# Altium PCB SixAxIMU_VN.PcbDoc
Units mm, origin at the board's own origin, x right, y up, seen from the top; angles counter-clockwise.
Board outline 30 x 35 mm, 2 copper layers (Top Layer, Bottom Layer); 23 components, 18 nets, 93 pads, 184 vias.
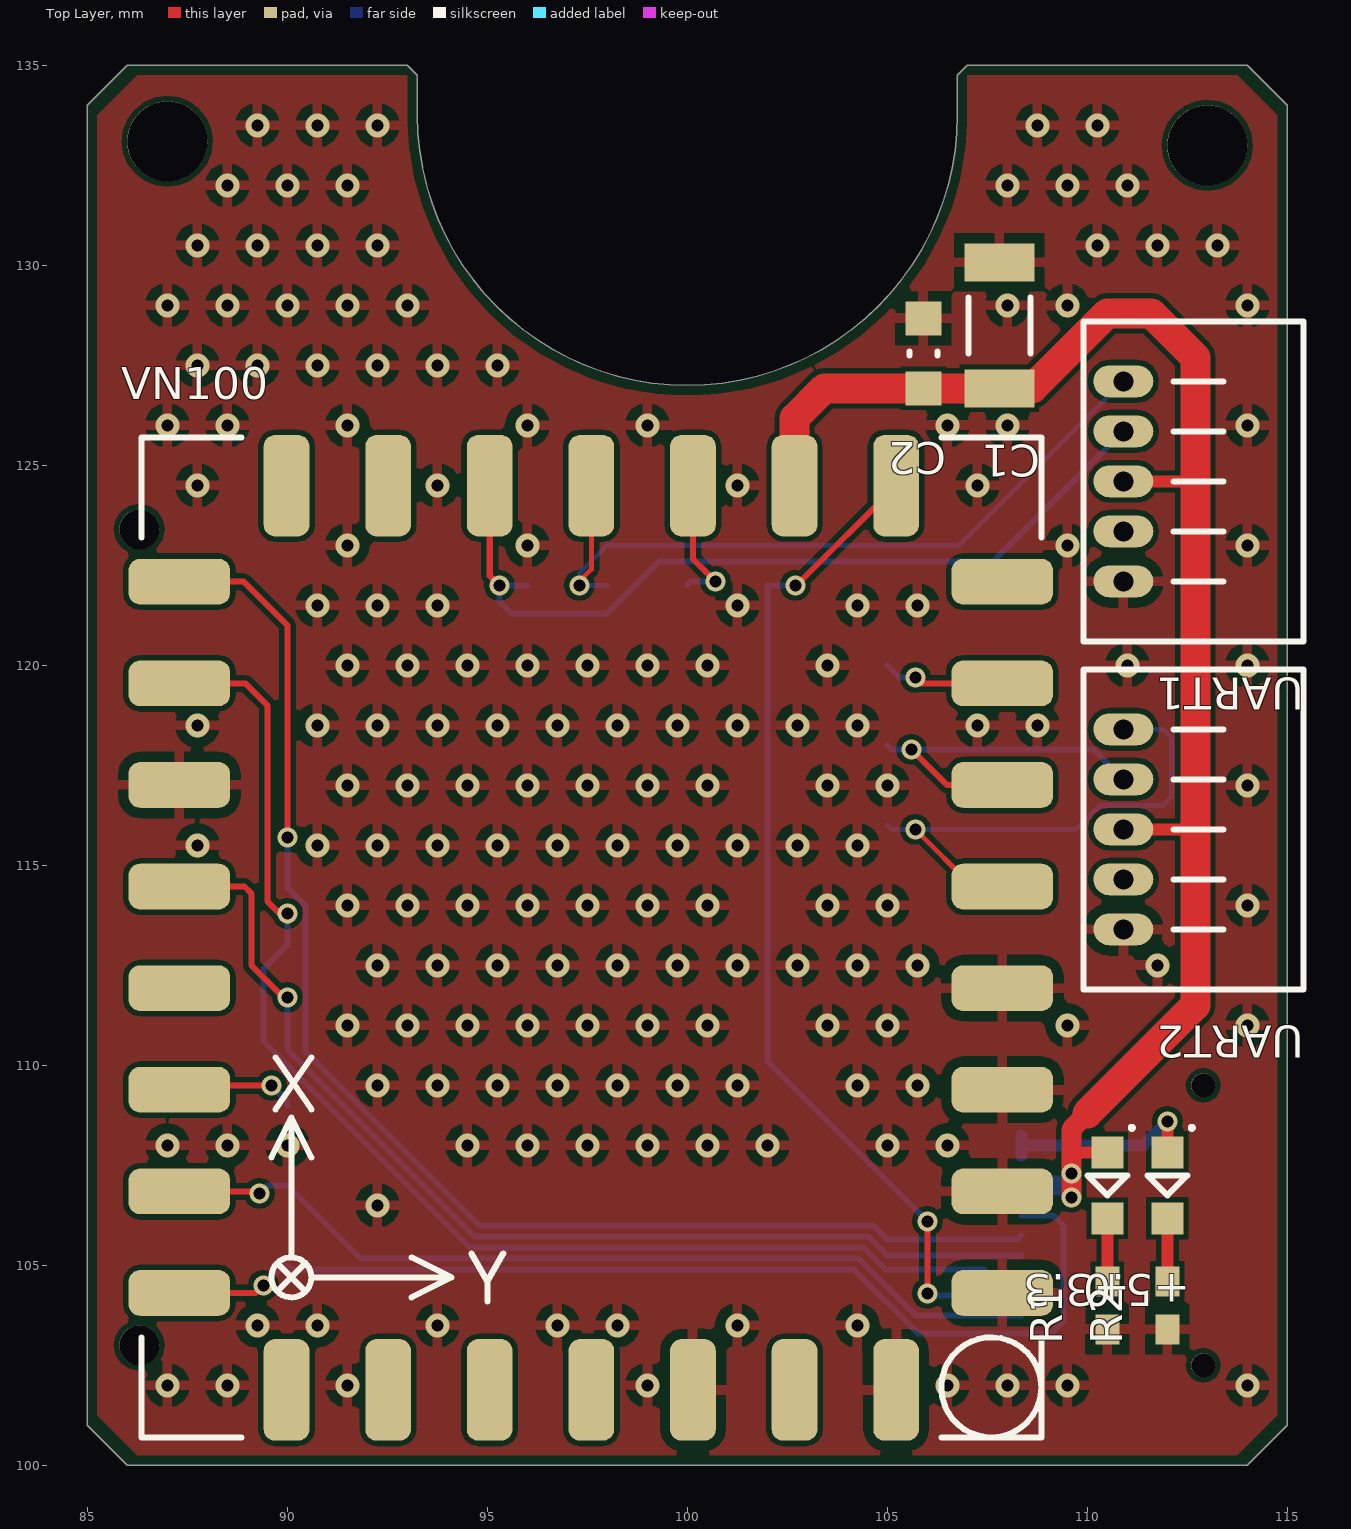
[diagram p0: Top Layer view]
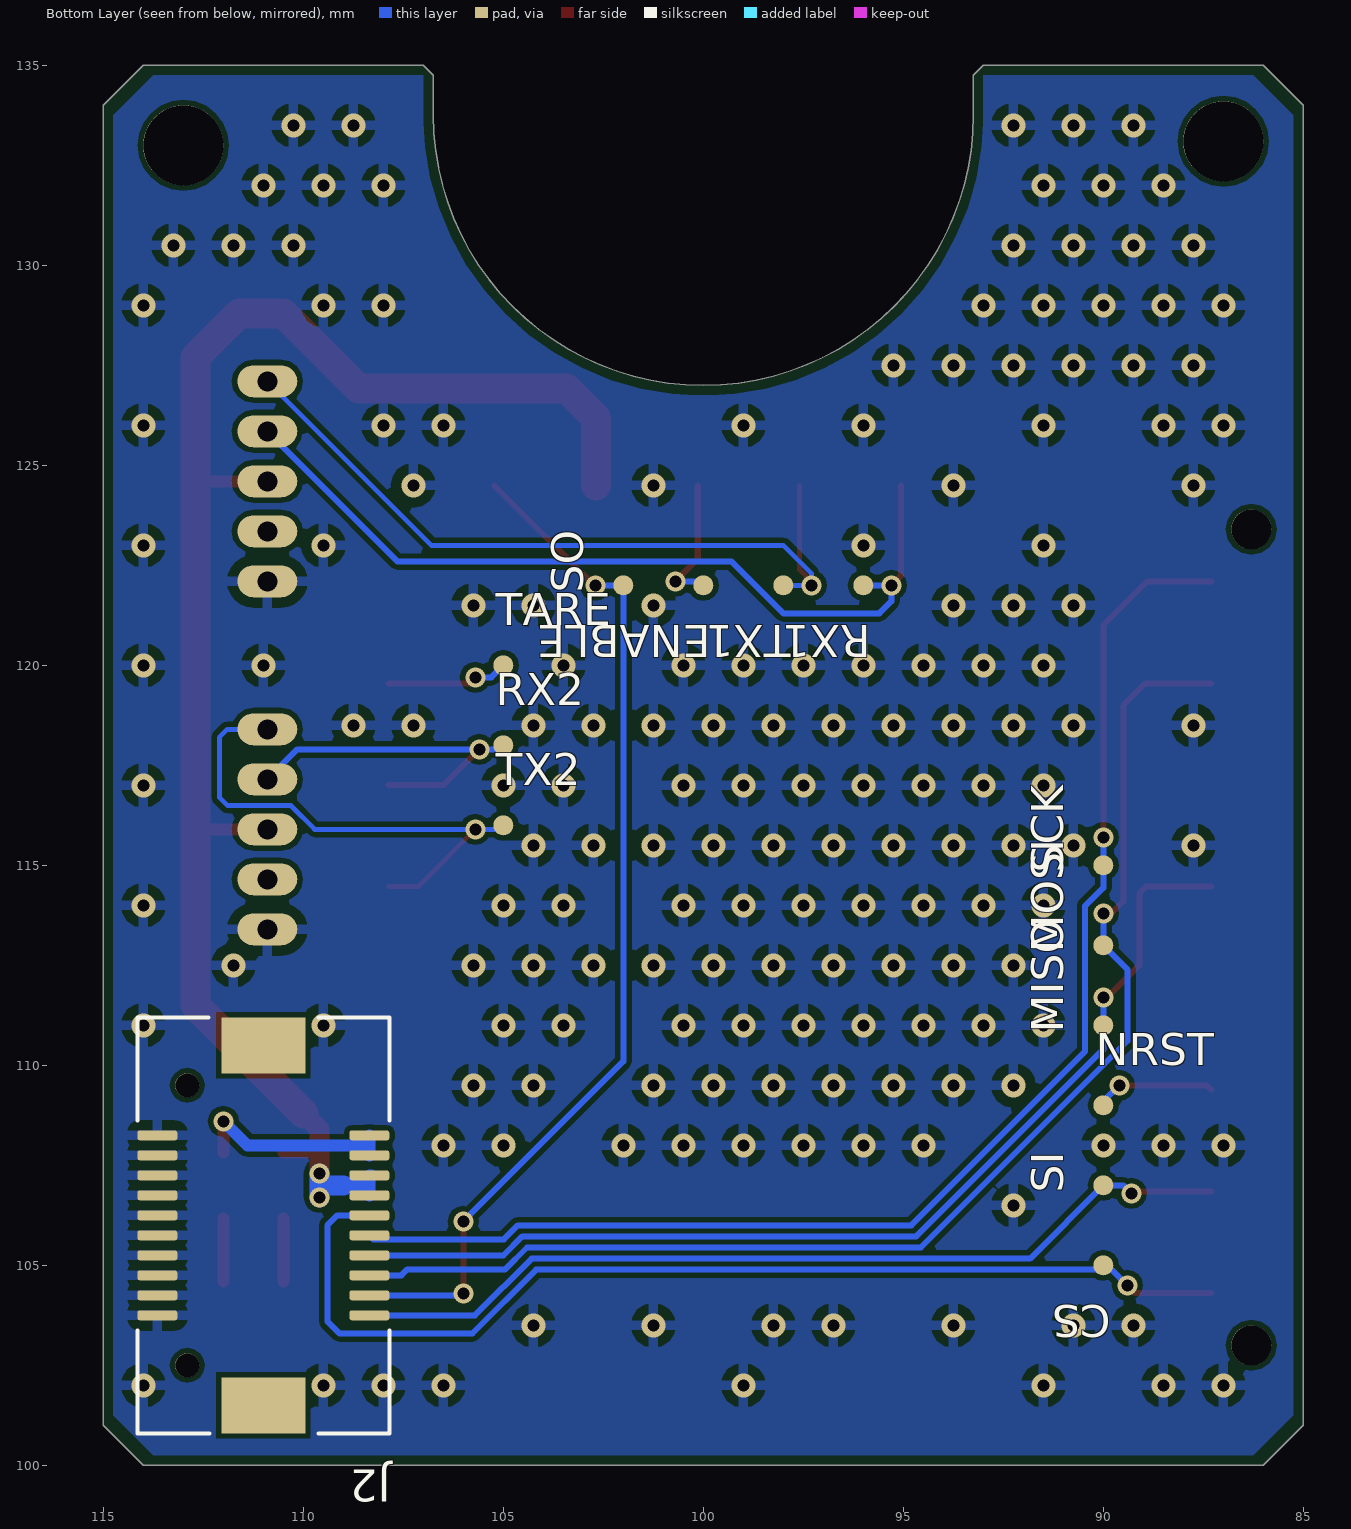
[diagram p1: Bottom Layer view, seen from below]

## Layer stack, top to bottom
Top Solder: solder mask 0.0102, Solder Resist, Dk 3.5
Top Layer: signal copper 0.0356
Dielectric 1: dielectric 0.32, FR-4, Dk 4.8
Bottom Layer: signal copper 0.0356
Bottom Solder: solder mask 0.0102, Solder Resist, Dk 3.5

## Board outline
86,100 85,101 85,134 86,135 93,135 93.25,134.75 93.25,133.75 ccw(c100,133.75) 100,127 ccw(c100,133.75) 106.75,133.75 106.75,134.75 107,135 114,135 115,134 115,101 114,100

## Design rules (kind name [scope] priority, off if disabled: settings)
Clearance Clearance_2 [InNamedPolygon('GND_L02_P006')] p1: gap=0.35
Clearance Clearance_1 [InNamedPolygon('+3.3_L03_P010')] p2: gap=0.35
Clearance [All] p3: gap=0.127
HoleSize [All] p1: absolutevalues=TRUE maxlimit=3 minlimit=0.2 maxpercent=80.000 minpercent=20.000
MinimumSolderMaskSliver [All] p1: minsoldermaskwidth=0.127
PlaneClearance [All] p1: clearance=0.5
PlaneConnect [All] p1: planeconnectstyle=Relief reliefexpansion=0.5 reliefentries=4 reliefconductorwidth=0.25 reliefairgap=0.25
PolygonConnect PolygonConnect_2 [All vs IsNamedPolygon('GND_RF_L01_P004')] p1: connectstyle=Direct reliefconductorwidth=0.254 reliefentries=4 polygonreliefangle="90 Angle" airgapwidth=0.254
PolygonConnect PolygonConnect_1 [All vs IsNamedPolygon('GND_RF_L04_P002')] p2: connectstyle=Direct reliefconductorwidth=0.254 reliefentries=4 polygonreliefangle="90 Angle" airgapwidth=0.254
PolygonConnect [All] p3: connectstyle=Relief reliefconductorwidth=0.25 reliefentries=4 polygonreliefangle="90 Angle" airgapwidth=0.25
RoutingCorners [All] p1: cornerstyle=45-Degree minsetback=2 maxsetback=2
RoutingVias [All] p1: holewidth=0.3 width=0.5 viastyle="Through Hole" minholewidth=0.2 minwidth=0.5 maxholewidth=0.5 maxwidth=0.7
SilkToSilkClearance [All] p1: silktosilkclearance=0.127
SilkToSolderMaskClearance [IsPad] p1: minsilkscreentomaskgap=0.127 clearancetoexposedcopper=TRUE
SolderMaskExpansion [All] p1: expansion=0.1
Width Width_POWERS [InNetClass('POWERS')] p1: maxlimit=1 minlimit=0.15 preferedwidth=0.5
Width [All] p2: maxlimit=0.3 minlimit=0.127 preferedwidth=0.15
23 further rules are at their usual default settings.

## Classes and differential pairs
net class POWERS: +3.3 +5.0 GND

## Components (designator, comment, footprint, x,y, rotation, side; value= is the part's Value field where it differs from the comment)
+3.3 "Red" "LED 0603" 110.5,107 r270 top
+5.0 "Red" "LED 0603" 112,107 r270 top
C1 "CL31A107MQHNNNE" "CAP 1206" 107.8,128.5 r270 top
C2 "CL10A105KA8NNNC" "CAP 0603" 105.9,127.8 r270 top
CS "TEST" "TEST_0.5mm, SMD" 90,105 r0 bottom
ENABLE "TEST" "TEST_0.5mm, SMD" 100,122 r0 bottom
J2 "DF17(2.0)-20DP-0.5V(57)" DF17(2.0)-20DP-0.5V(57) 111,106 r270 bottom
MISO "TEST" "TEST_0.5mm, SMD" 90,111 r0 bottom
MOSI "TEST" "TEST_0.5mm, SMD" 90,113 r0 bottom
NRST "TEST" "TEST_0.5mm, SMD" 90,109 r90 bottom
R1 "P311-1.00KLRTR-ND" "RES 0402" 110.5,104 r90 top
R2 "P311-1.00KLRTR-ND" "RES 0402" 112,104 r90 top
RX1 "TEST" "TEST_0.5mm, SMD" 96,122 r0 bottom
RX2 "TEST" "TEST_0.5mm, SMD" 105,118 r90 bottom
SCK "TEST" "TEST_0.5mm, SMD" 90,115 r0 bottom
SI "TEST" "TEST_0.5mm, SMD" 90,107 r90 bottom
SO "TEST" "TEST_0.5mm, SMD" 102,122 r90 bottom
TARE "TEST" "TEST_0.5mm, SMD" 105,120 r90 bottom
TX1 "TEST" "TEST_0.5mm, SMD" 98,122 r0 bottom
TX2 "TEST" "TEST_0.5mm, SMD" 105,116 r90 bottom
UART1 "53048-0510" "PicoBlade, 53048-0510" 110.9,124.6 r270 top
UART2 "53048-0510" "PicoBlade, 53048-0510" 110.9,115.9 r270 top
VN100 "VN-100" VN-100 97.6,113.2 r0 top

## Footprints (in the part's own frame and the unit in brackets; to place one, negate y for a bottom-side part, rotate by r counter-clockwise, add the part's x,y. Pads: shape width x height; smd on the part's side, far side on the other; paste and mask are expansions set on the pad)
"CAP 0603" [mm] "Chip Capacitor, 2-Leads, Body 1.60x0.80mm, IPC Medium Density"
  rect 0.85x0.9 smd: 1(-0.875,0) 2(0.875,0)
  silkscreen extent -0.05,-0.35 0.05,0.35, body extent -0.8,-0.4 0.8,0.4, height 0.8
"CAP 1206" [mm] "Chip Capacitor, 2-Leads, Body 3.20x1.60mm, IPC Medium Density"
  rect 0.95x1.75 smd: 1(-1.575,0) 2(1.575,0)
  silkscreen extent -0.7,-0.77 0.7,0.78, body extent -1.6,-0.8 1.6,0.8, height 1.6
DF17(2.0)-20DP-0.5V(57) [mm] "B2B, 20 POS HDR"
  rrect50% 0.25x1 smd: 1(-2.25,-2.65) 2(-1.75,-2.65) 3(-1.25,-2.65) 4(-0.75,-2.65) 5(-0.25,-2.65) 6(0.25,-2.65) 7(0.75,-2.65) 8(1.25,-2.65) 9(1.75,-2.65) 10(2.25,-2.65) 11(2.25,2.65) 12(1.75,2.65) 13(1.25,2.65) 14(0.75,2.65) 15(0.25,2.65) 16(-0.25,2.65) 17(-0.75,2.65) 18(-1.25,2.65) 19(-1.75,2.65) 20(-2.25,2.65)
  round 0.6 hole 0.6 unplated: 25(-3.5,-1.9) 26(3.5,-1.9)
  rect 1.4x2.1 smd: S0(-4.5,0) S1(4.5,0)
  silkscreen extent -5.2,-3.15 5.2,3.15, body extent -5,-2.85 5,2.85, height 4.26
"LED 0603" [mm] "Chip LED, 2-Leads, Body 1.60x0.80mm, IPC Medium Density"
  rect 0.8x0.8 smd: A(-0.825,0) K(0.825,0)
  silkscreen extent -1.49,-0.5 0.25,0.66, body extent -0.8,-0.4 0.8,0.4, height 0.75
"PicoBlade, 53048-0510" [mm] "PicoBlade, Header, R/A, PTH, 5 Pos, 1.25mm Pitch"
  oval 0.8x1.5 hole 0.5: 1(2.5,0) 2(1.25,0) 3(0,0) 4(-1.25,0) 5(-2.5,0)
  silkscreen extent -4,-1 4,4.5, body extent -4,-1.05 4,4.45, height 3.51
"RES 0402" [mm] "Chip Resistor, 2-Leads, Body 1.00x0.50mm, IPC Medium Density"
  rect 0.75x0.6 smd: 1(-0.6,0) 2(0.6,0)
  body extent -0.5,-0.25 0.5,0.25, height 0.35
"TEST_0.5mm, SMD" [mm]
  round 0.5 smd: 0(0,0)
VN-100 [mil] "VectorNav VN-100 SMD"
  rrect50% 100x45 smd: 1(404.5,-350) 2(404.5,-250) 3(404.5,-150) 4(404.5,-50) 5(404.5,50) 6(404.5,150) 7(404.5,250) 8(404.5,350) 16(-405.5,350) 17(-405.5,250) 18(-405.5,150) 19(-405.5,50) 20(-405.5,-50) 21(-405.5,-150) 22(-405.5,-250) 23(-405.5,-350)
  rrect50% 45x100 smd: 9(300,444.5) 10(200,444.5) 11(100,444.5) 12(0,444.5) 13(-100,444.5) 14(-200,444.5) 15(-300,444.5) 24(-300,-445.5) 25(-200,-445.5) 26(-100,-445.5) 27(0,-445.5) 28(100,-445.5) 29(200,-445.5) 30(300,-445.5)
  round 39.37 hole 39.37 unplated: 31(-444.88,-401.57) 32(-444.88,401.58)
  silkscreen extent -443,-492 443,492, body extent -425,-473 425,472, height 138

## Part data
+3.3 +5.0: library part 1608SURC-06, "LED, Red, 0603"
C1: "MLCC, 100uF, 1206, 20%, 6.3V, X5R"
C2: "MLCC, 1uF, 0603, 10%, 25V, X5R"
J2: "Conn, B2B, 20 Pos, HEADER"
R1 R2: "RES, 0402, 1k, 1%"
UART1 UART2: "PicoBlade, Header, R/A, PTH, 5 Pos, 1.25mm Pitch"
VN100: "Vector Nav SMD IMU/AHRS"

## Free pads (board coordinates)
  round 2 hole 2 unplated: HOLE(87,133.1) HOLE(113,133)

## Via types
v1: diameter 0.6, hole 0.3, Top Layer to Bottom Layer, tented both sides, 166 vias
v2: diameter 0.5, hole 0.3, Top Layer to Bottom Layer, tented both sides, 18 vias

## Nets (pads, with @x,y where several pads share a name; then routed paths per layer and width w, separated by ;. In a path a pad name is that pad's centre, name@x,y a point inside that pad or via, vN(x,y) a via of type N, cw(c..) or ccw(c..) an arc to the next point about the centre after c; other vN are vias at no path point)
+3.3: +3.3.A C1.2 C2.2 J2.17 J2.18 UART1.3 UART2.3 VN100.10 | length 42.5
  Top Layer w0.3: 109.6,107.85 109.625,107.825 +3.3.A ; UART2.3 112.7,115.9 ; UART1.3 112.7,124.6
  Top Layer w0.5: v2(109.6,106.7) v2(109.6,107.3) 109.6,107.85 109.6,108.4 110,108.8
  Top Layer w0.75: VN100.10 102.68,126.18 103.425,126.925 C2.2 C1.2 108.625,126.925 110.5,128.8 111.6,128.8 112.7,127.7 112.7,124.6 112.7,115.9 112.7,111.5 110,108.8
  Bottom Layer w0.3: J2.17 108.35,107 ; J2.18 108.298,107.25 108.35,107.198 108.35,107 ; 109,107 108.35,107
  Bottom Layer w0.5: 109,107 109.5,107 v2@109.6,106.9 ; v2(109.6,106.7) v2@109.6,106.9 ; v2(109.6,107.3) v2@109.6,106.9
+5.0: +5.0.A J2.19 J2.20 | length 5.2
  Top Layer w0.3: +5.0.A v2(112,108.6)
  Bottom Layer w0.3: J2.19 108.35,108 ; J2.20 108.35,108 ; v2(112,108.6) 111.4,108 108.35,108
GND: C1.1 C2.1 J2.1 J2.2 J2.3 J2.4 J2.5 J2.6 J2.7 J2.8 J2.9 J2.10 R1.1 R2.1 UART1.1 UART2.1 VN100.1 VN100.2 VN100.3 VN100.4 VN100.18 VN100.28 VN100.30
  other v1: 87,102 88.5,102 91.5,102 99,102 106.5,102 108,102 109.5,102 114,102 89.25,103.5 90.75,103.5 93.75,103.5 96.75,103.5 98.25,103.5 101.25,103.5 104.25,103.5 92.25,106.5 87,108 88.5,108 90,108 94.5,108 96,108 97.5,108 99,108 100.5,108 102,108 105,108 106.5,108 92.25,109.5 93.75,109.5 95.25,109.5 96.75,109.5 98.25,109.5 99.75,109.5 101.25,109.5 104.25,109.5 105.75,109.5 91.5,111 93,111 94.5,111 96,111 97.5,111 99,111 100.5,111 103.5,111 105,111 109.5,111 114,111 92.25,112.5 93.75,112.5 95.25,112.5 96.75,112.5 98.25,112.5 99.75,112.5 101.25,112.5 102.75,112.5 104.25,112.5 105.75,112.5 111.75,112.5 91.5,114 93,114 94.5,114 96,114 97.5,114 99,114 100.5,114 103.5,114 105,114 114,114 87.75,115.5 90.75,115.5 92.25,115.5 93.75,115.5 95.25,115.5 96.75,115.5 98.25,115.5 99.75,115.5 101.25,115.5 102.75,115.5 104.25,115.5 91.5,117 93,117 94.5,117 96,117 97.5,117 99,117 100.5,117 103.5,117 105,117 114,117 87.75,118.5 90.75,118.5 92.25,118.5 93.75,118.5 95.25,118.5 96.75,118.5 98.25,118.5 99.75,118.5 101.25,118.5 102.75,118.5 104.25,118.5 107.25,118.5 108.75,118.5 91.5,120 93,120 94.5,120 96,120 97.5,120 99,120 100.5,120 103.5,120 111,120 114,120 90.75,121.5 92.25,121.5 93.75,121.5 101.25,121.5 104.25,121.5 105.75,121.5 91.5,123 96,123 109.5,123 114,123 87.75,124.5 93.75,124.5 101.25,124.5 107.25,124.5 87,126 88.5,126 91.5,126 96,126 99,126 106.5,126 108,126 114,126 87.75,127.5 89.25,127.5 90.75,127.5 92.25,127.5 93.75,127.5 95.25,127.5 87,129 88.5,129 90,129 91.5,129 93,129 108,129 109.5,129 114,129 87.75,130.5 89.25,130.5 90.75,130.5 92.25,130.5 110.25,130.5 111.75,130.5 113.25,130.5 88.5,132 90,132 91.5,132 108,132 109.5,132 111,132 89.25,133.5 90.75,133.5 92.25,133.5 108.75,133.5 110.25,133.5
Net+3.3_K: +3.3.K R1.2 | length 1.6
  Top Layer w0.3: R1.2 +3.3.K
Net+5.0_K: +5.0.K R2.2 | length 1.6
  Top Layer w0.3: R2.2 +5.0.K
NetENABLE_0: ENABLE.0 VN100.11 | length 3.4
  Top Layer w0.152: VN100.11 100.14,122.66 v2(100.7,122.1)
  Bottom Layer w0.152: ENABLE.0 100.1,122.1 v2(100.7,122.1)
NetNRST_0: NRST.0 VN100.21 | length 3
  Top Layer w0.15: VN100.21 87.41,109.5 v2(89.6,109.5)
  Bottom Layer w0.15: v2(89.6,109.5) 90,109.1 NRST.0
NetTARE_0: TARE.0 VN100.7 | length 3.1
  Top Layer w0.152: v2(105.7,119.7) 105.85,119.55 VN100.7
  Bottom Layer w0.152: TARE.0 105.3,119.7 v2(105.7,119.7)
SPI1_MISO: J2.14 MISO.0 VN100.19 | length 26.8
  Top Layer w0.15: VN100.19 88.93,114.47 89.1,114.3 89.1,112.5 90,111.6 v2(90,111.7)
  Bottom Layer w0.15: v2(90,111.7) MISO.0 90,110.4 94.677,105.723 104.522,105.723 104.995,105.25 J2.14
SPI1_MOSI: J2.13 MOSI.0 VN100.17 | length 33.1
  Top Layer w0.15: VN100.17 88.95,119.55 89.5,119 89.5,114.1 90,113.6 v2(90,113.8)
  Bottom Layer w0.15: v2(90,113.8) MOSI.0 89.4,112.4 89.4,110.608 94.562,105.446 104.407,105.446 104.953,104.9 107.4,104.9 107.55,104.75 J2.13
SPI1_NSS: CS.0 J2.16 VN100.23 | length 26.8
  Top Layer w0.15: VN100.23 89.21,104.31 v2(89.4,104.5)
  Bottom Layer w0.15: v2(89.4,104.5) 89.9,105 CS.0 90.108,104.892 104.178,104.892 105.77,103.3 109.1,103.3 109.4,103.6 109.4,106 109.15,106.25 J2.16
SPI1_SCK: J2.15 SCK.0 VN100.16 | length 33.9
  Top Layer w0.15: VN100.16 88.91,122.09 90,121 v2(90,115.7)
  Bottom Layer w0.15: v2(90,115.7) SCK.0 90,114.439 90.452,113.987 90.452,110.348 94.8,106 104.637,106 104.989,105.648 108.248,105.648 J2.15
SYNC_IN: J2.11 SI.0 VN100.22 | length 22.5
  Top Layer w0.15: VN100.22 89.25,106.85 v2(89.3,106.8)
  Bottom Layer w0.15: v2(89.3,106.8) 89.5,107 SI.0 91.831,105.169 104.293,105.169 105.712,103.75 J2.11
SYNC_OUT: J2.12 SO.0 VN100.9 | length 26
  Top Layer w0.15: v2(106,104.3) v2(106,106.1)
  Top Layer w0.152: v2(102.7,122) 102.73,122 VN100.9
  Bottom Layer w0.15: SO.0 102,110.1 v2(106,106.1) ; v2(106,104.3) 106.05,104.25 J2.12
  Bottom Layer w0.152: SO.0@102,122 v2(102.7,122)
UART1_RX: RX1.0 UART1.4 VN100.13 | length 21.3
  Top Layer w0.152: VN100.13 95.06,122.24 v2(95.3,122)
  Bottom Layer w0.152: RX1.0 v2(95.3,122) 95.3,121.6 95.6,121.3 98,121.3 99.3,122.6 107.65,122.6 UART1.4
UART1_TX: TX1.0 UART1.5 VN100.12 | length 19.2
  Top Layer w0.127: v2(97.3,122) 97.3,122.1 97.6,122.4 VN100.12
  Bottom Layer w0.127: TX1.0 v2(97.3,122) 97.3,122.3 98,123 106.8,123 UART1.5
UART2_RX: RX2.0 UART2.4 VN100.6 | length 8.9
  Top Layer w0.152: v2(105.6,117.9) 106.49,117.01 VN100.6
  Bottom Layer w0.152: RX2.0 105.1,117.9 v2(105.6,117.9) 110.15,117.9 UART2.4
UART2_TX: TX2.0 UART2.5 VN100.5 | length 13
  Top Layer w0.127: v2(105.7,115.9) 107.13,114.47 VN100.5
  Bottom Layer w0.127: TX2.0 105.1,115.9 v2(105.7,115.9) 109.715,115.9 110.305,116.49 111.89,116.49 112.1,116.7 112.1,118.2 111.9,118.4 UART2.5
pads on no net: J2.25 J2.26 J2.S0 J2.S1 UART1.2 UART2.2 VN100.8 VN100.14 VN100.15 VN100.20 VN100.24 VN100.25 VN100.26 VN100.27 VN100.29 VN100.31 VN100.32

## Polygon pours and split planes (outlines as drawn)
GND on Top Layer "GND_L01_P000" (solid, pour order 0): 86.25,100.25 85.25,101.25 85.25,101.5 85.25,133.75 86.25,134.75 93,134.75 93,133.75 ccw(c100,133.75) 100,126.75 ccw(c100,133.75) 107,133.75 107,134.75 113.75,134.75 114.75,133.75 114.75,101.25 113.75,100.25
GND on Bottom Layer "GND_L02_P002" (solid, pour order 2): 86.25,100.25 85.25,101.25 85.25,101.5 85.25,133.75 86.25,134.75 93,134.75 93,133.75 ccw(c100,133.75) 100,126.75 ccw(c100,133.75) 107,133.75 107,134.75 113.75,134.75 114.75,133.75 114.75,101.25 113.75,100.25

## Silkscreen, mask and mechanical layers (free items; w line width, h text height)
Mechanical 28:
  circle w0.15: c100,133.8 r6.701
  lines w0.01: 70.5,100 120,100 120,125 ; 80,100 80,125 ; 85,100 85,122.5 ; 90,100 90,125 ; 95,100 95,122.5 ; 100,105 122.5,105 ; 100,110 125,110 ; 100,115 122.5,115 ; 100,120 125,120 ; 100,130 125,130 ; 100,135 122.5,135 ; 100,140 125,140 ; 100,149.5 100,100 ; 105,100 105,122.5 ; 110,100 110,125 ; 115,100 115,122.5 ; 122.5,125 100,125 100,100 ; 125,100 100,100
  lines w0.1: 87,127.5 88,127.5 ; 87.5,127 87.5,128 ; 90.3,127.5 91.3,127.5 ; 90.8,127 90.8,128 ; 85.5,104.3 93.9,104.3 93.9,110.1 85.5,110.1 85.5,104.3 ; 94.5,96 95,95.5 105,95.5 105.5,96 105.5,100 105.5,104.5 103,107 103,109.5 100.5,112 99.5,112 97,109.5 97,107 94.5,104.5 94.5,100 94.5,96
  lines w0.15: 110.5,106 111.5,106 ; 111,105.5 111,106.5 ; 85,101 85,134 86,135 114,135 115,134 115,101 114,100 92.5,100 92.5,101.6 92.4,101.7 87.4,101.7 87.3,101.6 87.3,100 86,100 85,101
  text "40mm" at 125,140 h0.8
  text "20mm" at 80,125 h0.8 r90
  text "10mm" at 90,125 h0.8 r90
  text "10mm" at 110,125 h0.8 r90
  text "20mm" at 120,125 h0.8 r90
  text "30mm" at 106.509,124.7 h0.8
  text "0mm" at 104.809,124.05 h0.8 r90
  text "20mm" at 106.509,114.7 h0.8
  text "10mm" at 125,110 h0.8
  text "0mm" at 125,100 h0.8